# Altium PCB PCB2.PcbDoc
Units mil, origin at the board's own origin, x right, y up, seen from the top; angles counter-clockwise.
Board outline 6000 x 4000 mil, 2 copper layers (Top Layer, Bottom Layer); 86 components, 57 nets, 223 pads, 0 vias.
Unrouted connection lines stored in the file: 155.
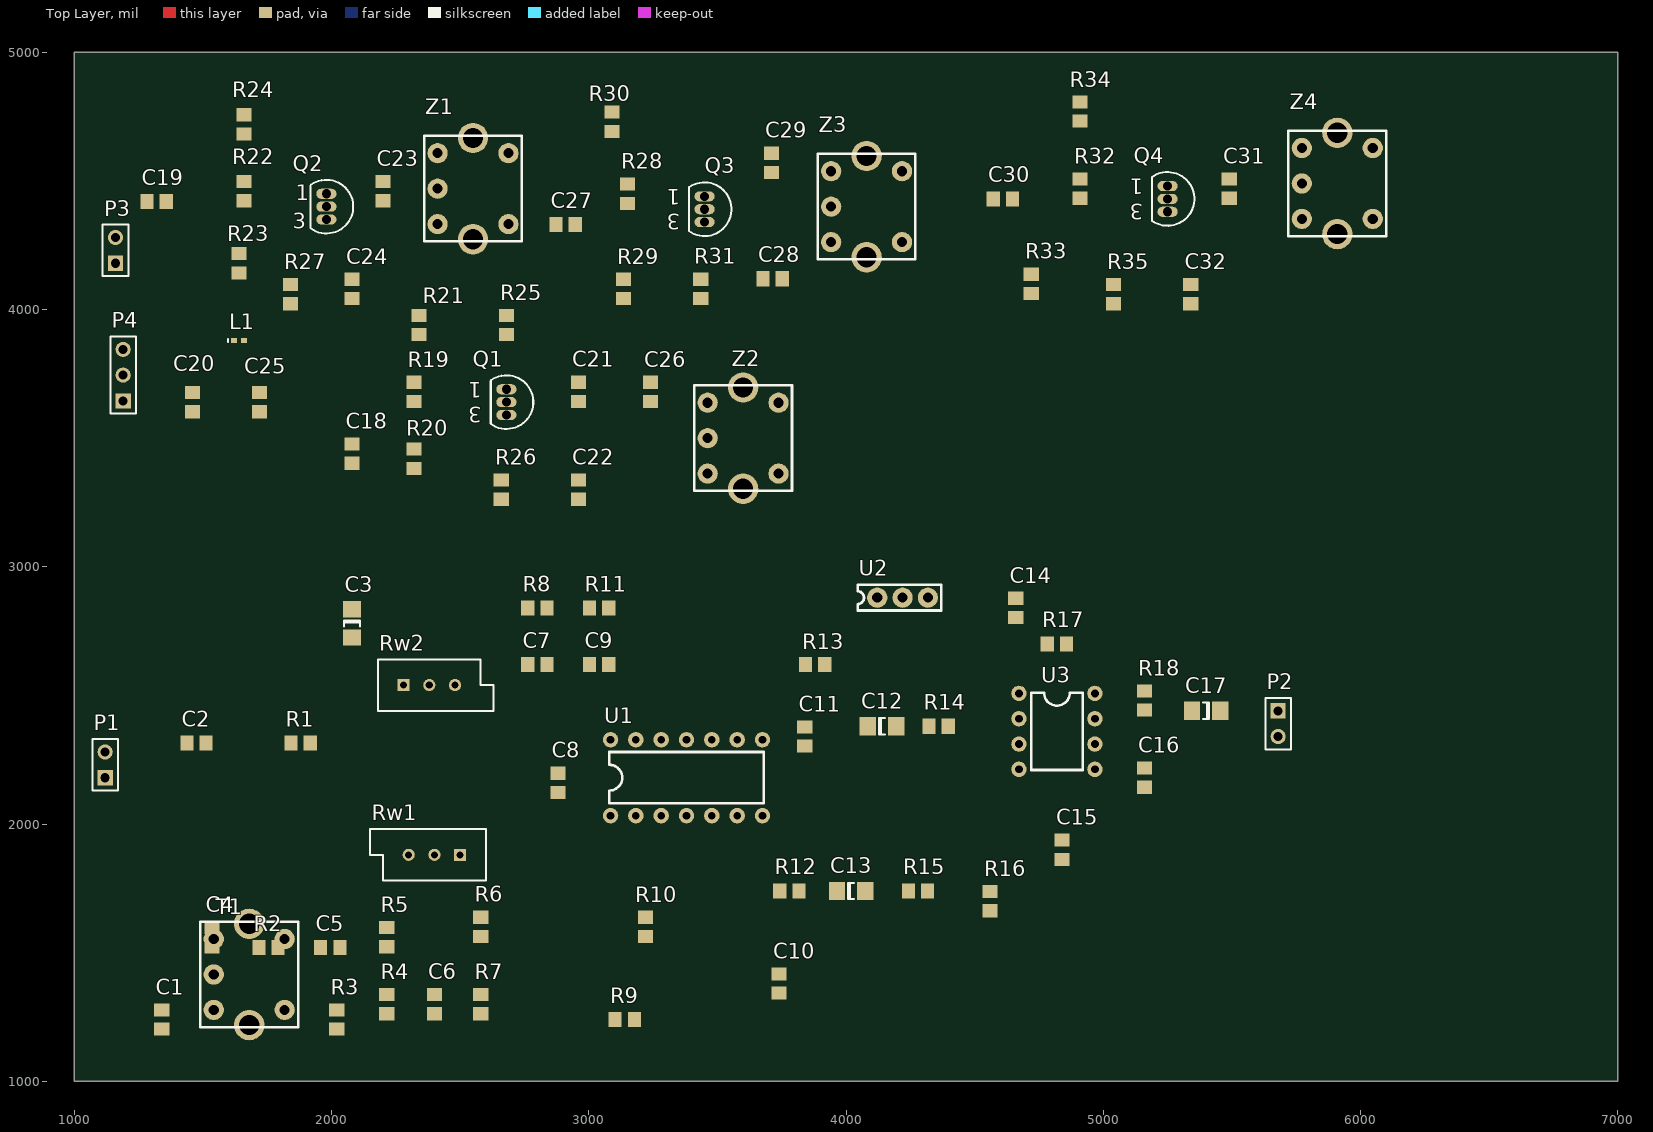
[diagram p0: Top Layer view]
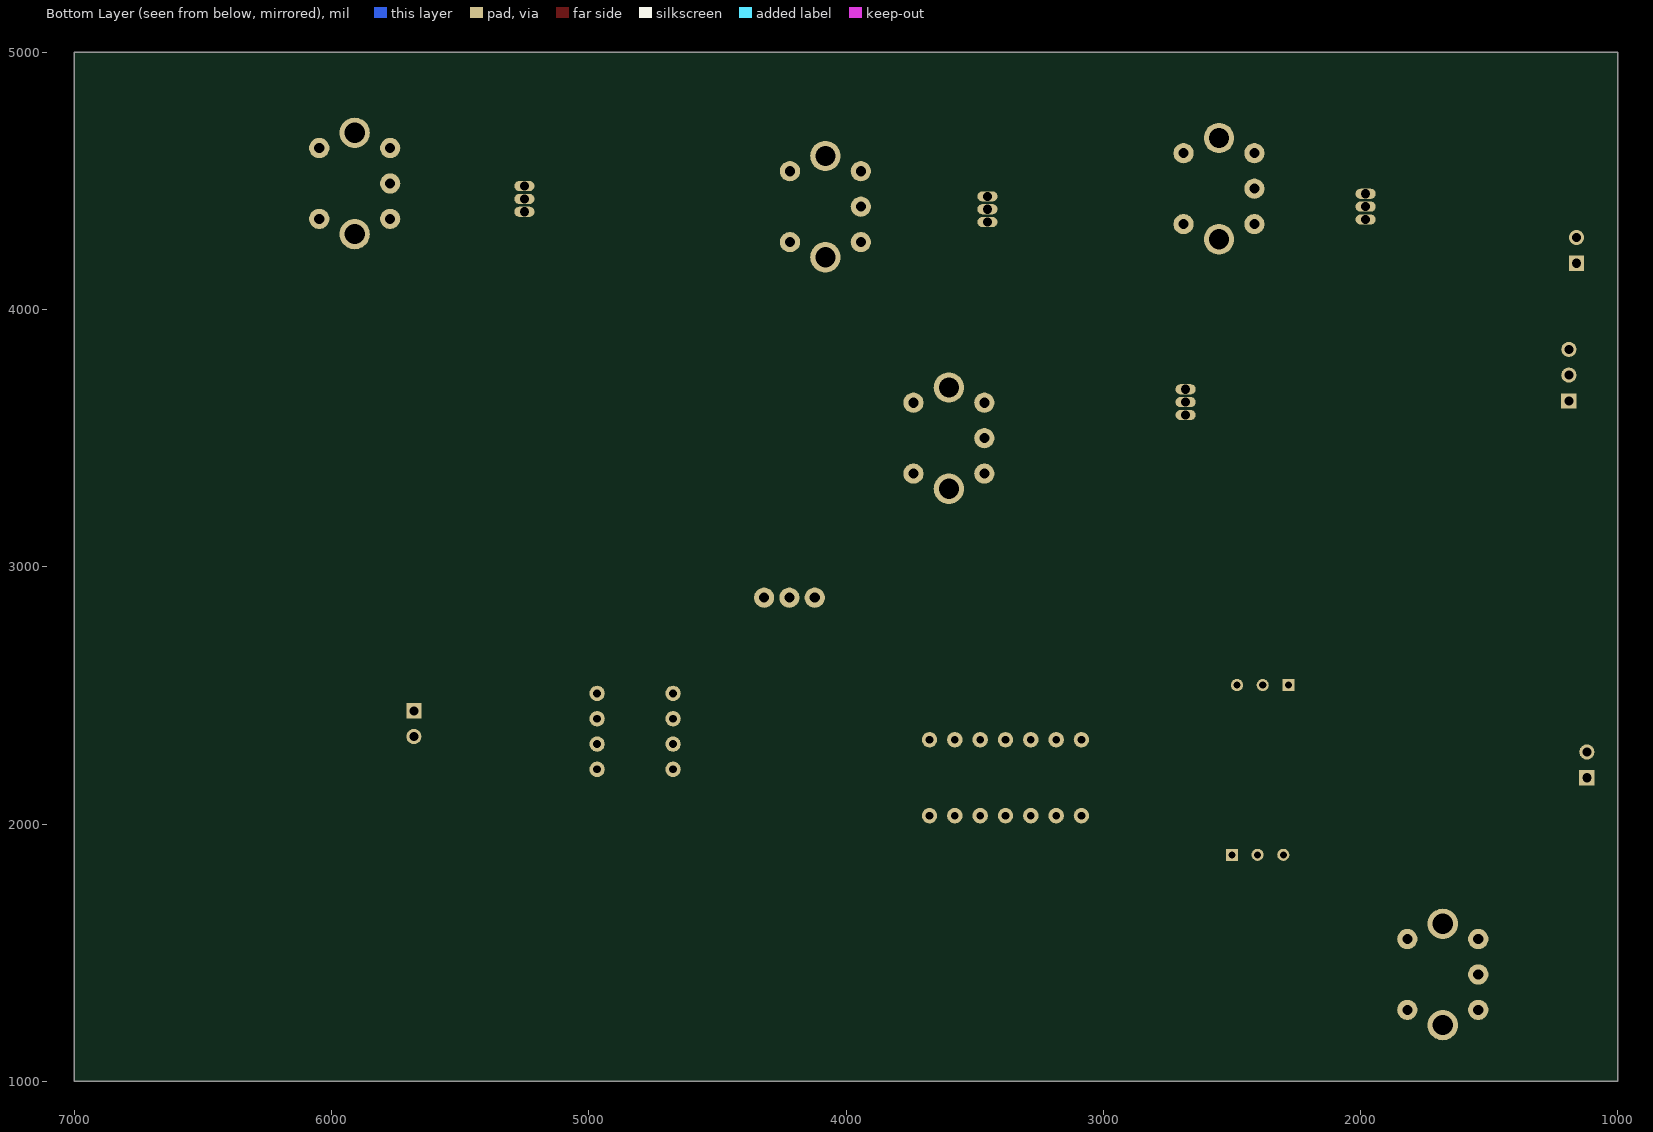
[diagram p1: Bottom Layer view, seen from below]

## Layer stack, top to bottom
Top Layer: signal copper 1.4
Dielectric: dielectric 12.6, FR-4, Dk 4.8
Bottom Layer: signal copper 1.4

## Board outline
1000,1000 7000,1000 7000,5000 1000,5000

## Design rules (kind name [scope] priority, off if disabled: settings)
Clearance [All] p1: gap=10
PolygonConnect [All] p1: connectstyle=Relief reliefconductorwidth=10 reliefentries=4 polygonreliefangle="90 Angle"
RoutingVias [All] p1: holewidth=28 width=50 viastyle="Through Hole" minholewidth=28 minwidth=50 maxholewidth=28 maxwidth=50
SilkscreenOverComponentPads [All] p1: minsilkscreentomaskgap=10
SolderMaskExpansion [All] p1: expansion=4
TestPointUsage [All] p1: valid=0 allowmultiple=FALSE
Testpoint [All] p1: side=15 testpointundercomponent=TRUE minsize=40 maxsize=100 preferedsize=60 minholesize=0 maxholesize=40 preferedholesize=32 testpointgrid=1 style=1023 order=0123456789
Width [All] p1: maxlimit=10 minlimit=10 preferedwidth=10
23 further rules are at their usual default settings.

## Classes and differential pairs
component class Sheet2: C18 C19 C20 C21 C22 C23 C24 C25 C26 C27 C28 C29 C30 C31 C32 L1 P3 P4 Q1 Q2 Q3 Q4 R19 R20 R21 R22 R23 R24 R25 R26 R27 R28 R29 R30 R31 R32 R33 R34 R35 Z1 Z2 Z3 Z4
component class Sheet1: C1 C2 C3 C4 C5 C6 C7 C8 C9 C10 C11 C12 C13 C14 C15 C16 C17 P1 P2 R1 R2 R3 R4 R5 R6 R7 R8 R9 R10 R11 R12 R13 R14 R15 R16 R17 R18 Rw1 Rw2 T1 U1 U2 U3

## Components (designator, comment, footprint, x,y, rotation, side; value= is the part's Value field where it differs from the comment)
C1 "Cap" 2012[0805] 1340,1240 r90 top
C2 "Cap" 2012[0805] 1475,2315 r0 top
C3 "Cap Pol1" C1206 2080,2780 r270 top
C4 "Cap" 2012[0805] 1535,1560 r90 top
C5 "Cap" 2012[0805] 1995,1520 r0 top
C6 "Cap" 2012[0805] 2400,1300 r90 top
C7 "Cap" 2012[0805] 2800,2620 r0 top
C8 "Cap" 2012[0805] 2880,2160 r90 top
C9 "Cap" 2012[0805] 3040,2620 r0 top
C10 "Cap" 2012[0805] 3740,1380 r90 top
C11 "Cap" 2012[0805] 3840,2340 r90 top
C12 "Cap Pol1" C1206 4140,2380 r0 top
C13 "Cap Pol1" C1206 4020,1740 r0 top
C14 "Cap" 2012[0805] 4660,2840 r90 top
C15 "Cap" 2012[0805] 4840,1900 r90 top
C16 "Cap" 2012[0805] 5160,2180 r90 top
C17 "Cap Pol1" C1206 5400,2440 r180 top
C18 "Cap" 2012[0805] 2080,3440 r270 top
C19 "Cap" 2012[0805] 1320,4420 r0 top
C20 "Cap" 2012[0805] 1460,3640 r90 top
C21 "Cap" 2012[0805] 2960,3680 r270 top
C22 "Cap" 2012[0805] 2960,3300 r270 top
C23 "Cap" 2012[0805] 2200,4460 r270 top
C24 "Cap" 2012[0805] 2080,4080 r90 top
C25 "Cap" 2012[0805] 1720,3640 r90 top
C26 "Cap" 2012[0805] 3240,3680 r90 top
C27 "Cap" 2012[0805] 2910,4330 r0 top
C28 "Cap" 2012[0805] 3715,4120 r0 top
C29 "Cap" 2012[0805] 3710,4570 r270 top
C30 "Cap" 2012[0805] 4610,4430 r0 top
C31 "Cap" 2012[0805] 5490,4470 r270 top
C32 "Cap" 2012[0805] 5340,4060 r90 top
L1 "Inductor" 0402-A 1640,3880 r0 top
P1 "Header 2" HDR1X2 1120,2180 r90 top
P2 "Header 2" HDR1X2 5680,2440 r270 top
P3 "Header 2" HDR1X2 1160,4180 r90 top
P4 "Header 3" HDR1X3 1190,3645 r90 top
Q1 "NPN" TO-226 2680,3640 r180 top
Q2 "NPN" TO-226 1980,4400 r180 top
Q3 "NPN" TO-226 3450,4390 r180 top
Q4 "NPN" TO-226 5250,4430 r180 top
R1 "Res1" 2012[0805] 1880,2315 r0 top
R2 "Res1" 2012[0805] 1755,1520 r0 top
R3 "Res1" 2012[0805] 2020,1240 r90 top
R4 "Res1" 2012[0805] 2215,1300 r90 top
R5 "Res1" 2012[0805] 2215,1560 r90 top
R6 "Res1" 2012[0805] 2580,1600 r90 top
R7 "Res1" 2012[0805] 2580,1300 r90 top
R8 "Res1" 2012[0805] 2800,2840 r0 top
R9 "Res1" 2012[0805] 3140,1240 r0 top
R10 "Res1" 2012[0805] 3220,1600 r90 top
R11 "Res1" 2012[0805] 3040,2840 r0 top
R12 "Res1" 2012[0805] 3780,1740 r0 top
R13 "Res1" 2012[0805] 3880,2620 r0 top
R14 "Res1" 2012[0805] 4360,2380 r0 top
R15 "Res1" 2012[0805] 4280,1740 r0 top
R16 "Res1" 2012[0805] 4560,1700 r90 top
R17 "Res1" 2012[0805] 4820,2700 r0 top
R18 "Res1" 2012[0805] 5160,2480 r90 top
R19 "Res1" 2012[0805] 2320,3680 r90 top
R20 "Res1" 2012[0805] 2320,3420 r90 top
R21 "Res Adj1" 2012[0805] 2340,3940 r270 top
R22 "Res1" 2012[0805] 1660,4460 r90 top
R23 "Res1" 2012[0805] 1640,4180 r90 top
R24 "Res Adj1" 2012[0805] 1660,4720 r270 top
R25 "Res1" 2012[0805] 2680,3940 r90 top
R26 "Res1" 2012[0805] 2660,3300 r90 top
R27 "Res1" 2012[0805] 1840,4060 r90 top
R28 "Res1" 2012[0805] 3150,4450 r90 top
R29 "Res1" 2012[0805] 3135,4080 r90 top
R30 "Res Adj1" 2012[0805] 3090,4730 r270 top
R31 "Res1" 2012[0805] 3435,4080 r90 top
R32 "Res1" 2012[0805] 4910,4470 r90 top
R33 "Res1" 2012[0805] 4720,4100 r90 top
R34 "Res Adj1" 2012[0805] 4910,4770 r270 top
R35 "Res1" 2012[0805] 5040,4060 r90 top
Rw1 "RPot" VR5 2400,1880 r180 top
Rw2 "RPot" VR5 2380,2540 r0 top
T1 "zhongzhou" zhongzhou 1680,1415 r0 top
U1 "MC1496" MC1496 3380,2180 r0 top
U2 "LM7808" LM7808 4220,2880 r0 top
U3 "LM741" LM741 4820,2360 r0 top
Z1 "zhongzhou1" zhongzhou 2550,4470 r0 top
Z2 "zhongzhou4" zhongzhou 3600,3500 r0 top
Z3 "zhongzhou2" zhongzhou 4080,4400 r0 top
Z4 "zhongzhou3" zhongzhou 5910,4490 r0 top

## Footprints (in the part's own frame and the unit in brackets; to place one, negate y for a bottom-side part, rotate by r counter-clockwise, add the part's x,y. Pads: shape width x height; smd on the part's side, far side on the other; paste and mask are expansions set on the pad)
0402-A [mm] "Chip Inductor; Body 1 x 0.5 mm (LxW typ)"
  rect 0.6x0.5 smd: 1(-0.5,0) 2(0.5,0)
  silkscreen extent -1.1,-0.15 -1.1,0.15
2012[0805] [mm] "Chip Resistor; Body 2.0 x 1.3 mm (LxW typ)"
  rect 1.3x1.5 smd: 1(-0.95,0) 2(0.95,0)
C1206 [mm] "Chip Capacitor; Body 3.2 x 1.6 mm (LxW typ)"
  rect 1.6x1.8 smd: 1(-1.4,0) 2(1.4,0)
  silkscreen extent -0.3,-0.8 0.3,0.8
HDR1X2 [mm] "Connector; Header; 2 Position"
  rect 1.5x1.5 hole 0.9: 1(0,0)
  round 1.5 hole 0.9: 2(2.54,0)
  silkscreen extent -1.27,-1.27 3.81,1.27
HDR1X3 [mm] "Connector; Header; 3 Position"
  rect 1.5x1.5 hole 0.9: 1(0,0)
  round 1.5 hole 0.9: 2(2.54,0) 3(5.08,0)
  silkscreen extent -1.27,-1.27 6.35,1.27
LM741 [mil]
  round 60 hole 30: 1(-147.64,147.64) 2(-147.64,49.21) 3(-147.64,-49.21) 4(-147.64,-147.64) 5(147.64,-147.64) 6(147.64,-49.21) 7(147.64,49.21) 8(147.64,147.64)
  silkscreen extent -100,-150 100,150
LM7808 [mm]
  round 2 hole 1: 1(-2.5,0) 2(0,0) 3(2.5,0)
  silkscreen extent -4.44,-1.27 3.81,1.27
MC1496 [mil]
  round 60 hole 30: 1(-295.28,-147.64) 2(-196.85,-147.64) 3(-98.43,-147.64) 4(0,-147.64) 5(98.43,-147.64) 6(196.85,-147.64) 7(295.28,-147.64) 8(295.28,147.64) 9(196.85,147.64) 10(98.43,147.64) 11(0,147.64) 12(-98.43,147.64) 13(-196.85,147.64) 14(-295.28,147.64)
  silkscreen extent -300,-100 300,100
TO-226 [mm] "TO, Flat Index; 3 In-Line, Axial Leads; Body Dia. 4.8mm; Leads 0.55 x 0.51 mm (max)"
  oval 2x1 hole 0.9: 1(0,-1.27) 2(0,0) 3(0,1.27)
  silkscreen extent -2.65,-2.65 1.55,2.65
VR5 [mm] "Potentiometer; 3 Leads"
  rect 1.2x1.2 hole 0.7: 1(-2.54,0)
  round 1.2 hole 0.7: 2(0,0) 3(2.54,0)
  silkscreen extent -5.08,-2.54 6.35,2.54
zhongzhou [mm]
  round 2 hole 1: 1(-3.5,3.5) 2(-3.5,0) 3(-3.5,-3.5) 4(3.5,-3.5) 5(3.5,3.5)
  round 3 hole 2: 6(0,5) 7(0,-5)
  silkscreen extent -4.83,-5.21 4.83,5.21

## Part data
C1 C2 C4 C5 C6 C7 C8 C9 C10 C11 C14 C15 C16 C18 C19 C20 C21 C22 C23 C24 C25 C26 C27 C28 C29 C30 C31 C32: "Capacitor"
C3 C12 C13 C17: "Polarized Capacitor (Radial)"
P1 P2 P3: "Header, 2-Pin"
P4: "Header, 3-Pin"
Q1 Q2 Q3 Q4: "NPN Bipolar Transistor"
R1 R2 R3 R4 R5 R6 R7 R8 R9 R10 R11 R12 R13 R14 R15 R16 R17 R18 R19 R20 R22 R23 R25 R26 R27 R28 R29 R31 R32 R33 R35: "Resistor"
R21 R24 R30 R34: "Variable Resistor"
Rw1 Rw2: "Potentiometer"

## Nets (pads, with @x,y where several pads share a name; then routed paths per layer and width w, separated by ;. In a path a pad name is that pad's centre, name@x,y a point inside that pad or via, vN(x,y) a via of type N, cw(c..) or ccw(c..) an arc to the next point about the centre after c; other vN are vias at no path point)
+12V: C3.1 C23.1 C25.2 C29.1 C31.1 L1.2 R8.1 R21.1 R24.1 R25.2 R30.1 R34.1 Z1.1 Z3.1 Z4.1
-8V: C8.2 C15.2 P4.2 Rw1.3 U1.14 U3.4
GND: C1.1 C3.2 C6.1 C8.1 C10.1 C11.1 C14.1 C15.1 C16.1 C18.2 C20.1 C22.2 C24.1 C25.1 C32.1 P2.2 P3.1 P4.1 R3.1 R4.1 R7.1 R9.1 R16.1 R20.1 R23.1 R26.1 R27.1 R29.1 R31.1 R33.1 R35.1 T1.3 T1.4 T1.6 T1.7 U2.2 Z1.4 Z1.6 Z1.7 Z2.3 Z2.4 Z2.6 Z2.7 Z3.4 Z3.6 Z4.4 Z4.6 Z4.7
NetC1_2: C1.2 C4.1 R2.1 T1.1
NetC2_1: C2.1 P1.2
NetC2_2: C2.2 C4.2 R1.1
NetC5_1: C5.1 R2.2
NetC5_2: C5.2 R4.2 R5.1 U1.1
NetC6_2: C6.2 R6.1 R7.2 U1.4
NetC7_1: C7.1 Rw2.1 U1.8
NetC7_2: C7.2 C9.1 R8.2 R11.1 Rw2.3
NetC9_2: C9.2 R11.2
NetC10_2: C10.2 C13.1 R12.1 U1.6
NetC11_2: C11.2 C12.1 R13.1 U1.12
NetC12_2: C12.2 R14.1
NetC13_2: C13.2 R15.1
NetC14_2: C14.2 U2.3 U3.7
NetC16_2: C16.2 C17.1 R18.1
NetC17_2: C17.2 P2.1
NetC18_1: C18.1 Q1.2 R19.1 R20.2
NetC19_1: C19.1 P3.2
NetC19_2: C19.2 Q2.2 R22.1 R23.2
NetC20_2: C20.2 L1.1 P4.3
NetC21_1: C21.1 C26.2 Q1.1 R25.1
NetC21_2: C21.2 C22.1
NetC23_2: C23.2 Z1.3
NetC24_2: C24.2 Q2.3 R27.2
NetC26_1: C26.1 Z2.1
NetC27_1: C27.1 Z1.5
NetC27_2: C27.2 Q3.2 R28.1 R29.2
NetC28_1: C28.1 Q3.3 R31.2
NetC28_2: C28.2 Z2.5
NetC29_2: C29.2 Z3.3
NetC30_1: C30.1 Z3.5
NetC30_2: C30.2 Q4.2 R32.1 R33.2
NetC31_2: C31.2 Z4.3
NetC32_2: C32.2 Q4.3 R35.2
NetQ1_3: Q1.3 R26.2
NetQ2_1: Q2.1 Z1.2
NetQ3_1: Q3.1 Z3.2
NetQ4_1: Q4.1 Z4.2
NetR1_2: R1.2 Rw2.2 U1.10
NetR3_2: R3.2 T1.5
NetR5_2: R5.2 Rw1.2
NetR6_2: R6.2 Rw1.1
NetR9_2: R9.2 U1.5
NetR10_1: R10.1 U1.3
NetR10_2: R10.2 U1.2
NetR12_2: R12.2 R13.2 U2.1
NetR14_2: R14.2 R17.1 U3.2
NetR15_2: R15.2 R16.2 U3.3
NetR17_2: R17.2 R18.2 U3.6
NetR19_2: R19.2 R21.2
NetR22_2: R22.2 R24.2
NetR28_2: R28.2 R30.2
NetR32_2: R32.2 R34.2
ZHONGFANG: P1.1 Z4.5
pads on no net: T1.2 U1.7 U1.9 U1.11 U1.13 U3.1 U3.5 U3.8 Z2.2 Z3.7

## Text inside footprints (layer, text, board x,y; h text height)
Q1: Top Overlay "1" at 2584.68,3717.91 h59.05 r180; Top Overlay "3" at 2584.68,3621.61 h59.05 r180
Q2: Top Overlay "1" at 1860,4425 h59.05; Top Overlay "3" at 1850,4315 h59.05
Q3: Top Overlay "1" at 3354.68,4467.91 h59.05 r180; Top Overlay "3" at 3354.68,4371.61 h59.05 r180
Q4: Top Overlay "1" at 5154.69,4507.91 h59.05 r180; Top Overlay "3" at 5154.69,4411.61 h59.05 r180